# EAGLE board Sensori+Base (EAGLE 7.7.0)
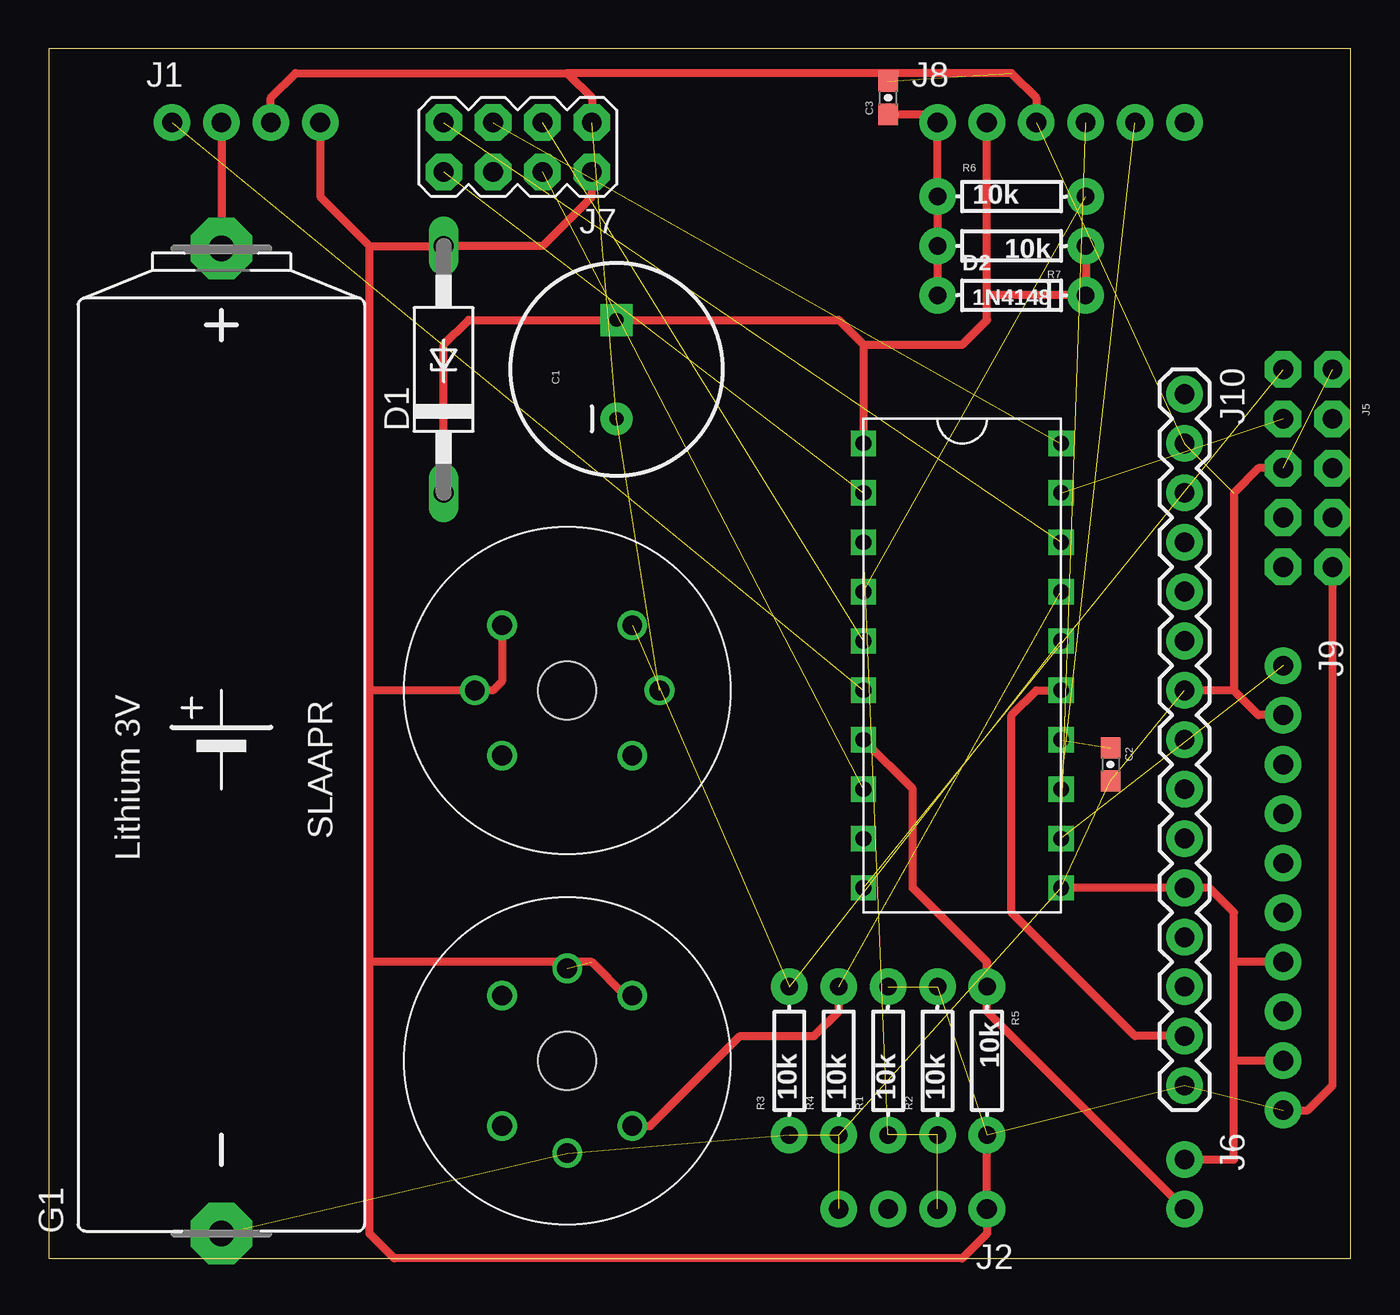
[diagram p0: board, top side]

Size 66.98 x 62.22 mm. Coordinates in mm from the lower left corner, seen from the top.
Outline: 0,0 66.98,0 66.98,62.22 0,62.22 0,0
Copper layers (1*16): Top 0.035mm / dielectric 1.5mm / Bottom 0.035mm
Design rules "default": minimum track width 10mil, minimum drill 24mil, track to track 8mil, track to pad 8mil, pad to pad 8mil, via to via 8mil, smd to smd 8mil, copper to edge 40mil, drill to drill 8mil, minimum pad ring 10mil, minimum via ring 8mil, stop-mask expansion 4mil, vias tented up to drill 0mil, thermal gap 10mil

## Footprints (pad centres in the part's own frame; a part is rotated, then mirrored left to right if it is on the bottom)
CPOL-RADIAL-1000UF-25V = drill 0.7 pad 1.651 square: 1 2.54,0 | drill 0.7 pad 1.651: 2 -2.54,0
0603-CAP = smd 1.1 x 1: 1 -0.85,0; 2 0.85,0
F126Z12 = drill 1.016 long: A 6.35,0; C -6.35,0
DIODE-1N4148 = drill 0.9 pad 1.88: A -3.81,0; C 3.81,0
SL-160AA/PR = drill 1.321 pad 3.15 octagon: + 25.273,0; - -25.4,0
1X04_NO_SILK_ALL_ROUND = drill 1.016 pad 1.88: 1 0,0; 2 2.54,0; 3 5.08,0; 4 7.62,0
2X5_NOSILK = drill 1.016 pad 1.88 octagon: 1 -1.27,5.08; 2 1.27,5.08; 3 -1.27,2.54; 4 1.27,2.54; 5 -1.27,0; 6 1.27,0; 7 -1.27,-2.54; 8 1.27,-2.54; 9 -1.27,-5.08; 10 1.27,-5.08
1X02_NO_SILK = drill 1.016 pad 1.88: 1 0,0; 2 2.54,0
2X4 = drill 1.016 pad 1.88 octagon: 1 -3.81,-1.27; 2 -3.81,1.27; 3 -1.27,-1.27; 4 -1.27,1.27; 5 1.27,-1.27; 6 1.27,1.27; 7 3.81,-1.27; 8 3.81,1.27
1X06_NO_SILK = drill 1.016 pad 1.88: 1 0,0; 2 2.54,0; 3 5.08,0; 4 7.62,0; 5 10.16,0; 6 12.7,0
1X10_NO_SILK = drill 1.016 pad 1.88: 1 0,0; 2 2.54,0; 3 5.08,0; 4 7.62,0; 5 10.16,0; 6 12.7,0; 7 15.24,0; 8 17.78,0; 9 20.32,0; 10 22.86,0
1X15 = drill 1.016 pad 1.88: 1 0,0; 2 2.54,0; 3 5.08,0; 4 7.62,0; 5 10.16,0; 6 12.7,0; 7 15.24,0; 8 17.78,0; 9 20.32,0; 10 22.86,0; 11 25.4,0; 12 27.94,0; 13 30.48,0; 14 33.02,0; 15 35.56,0
AXIAL-0.3EZ = drill 0.9 pad 1.88: P$1 -3.81,0; P$2 3.81,0
MQ-3 = drill 1.016: A1 -3.35,3.35; A2 -3.35,-3.35; B1 3.35,3.35; B2 3.35,-3.35; HA -4.75,0; HB 4.75,0 | hole 3: 0,0
SPDIP-20PIN = drill 0.8 square: P$1 -5.08,10.16; P$2 -5.08,7.62; P$3 -5.08,5.08; P$4 -5.08,2.54; P$5 -5.08,0; P$6 -5.08,-2.54; P$7 -5.08,-5.08; P$8 -5.08,-7.62; P$9 -5.08,-10.16; P$10 -5.08,-12.7; P$11 5.08,10.16; P$12 5.08,7.62; P$13 5.08,5.08; P$14 5.08,2.54; P$15 5.08,0; P$16 5.08,-2.54; P$17 5.08,-5.08; P$18 5.08,-7.62; P$19 5.08,-10.16; P$20 5.08,-12.7

## Placement (x,y rotation side)
C1  1mF or SuperCap  [CPOL-RADIAL-1000UF-25V]  29.21,45.72 90 top
C2  10uF  [0603-CAP]  54.61,25.4 270 top
C3  10uF  [0603-CAP]  43.18,59.69 90 top
D1  SCHOTTKY  [F126Z12]  20.32,45.72 90 top
D2  1N4148  [DIODE-1N4148]  49.53,49.53 0 top
G1  SL-160AA/PR  [SL-160AA/PR]  8.89,26.67 90 top
J1  POWER  [1X04_NO_SILK_ALL_ROUND]  6.35,58.42 0 top
J2  HUMIDITY & TEMPERATURE SENSOR  [1X04_NO_SILK_ALL_ROUND]  48.26,2.54 180 top
J5  RASPBERRY  [2X5_NOSILK]  64.77,40.64 180 top
J6  FLOOD DETECTOR  [1X02_NO_SILK]  58.42,5.08 270 top
J7  RTX  [2X4]  24.13,57.15 180 top
J8  PICKIT  [1X06_NO_SILK]  45.72,58.42 0 top
J9  TX 433MHz  [1X10_NO_SILK]  63.5,30.48 270 top
J10  RX 433MHz  [1X15]  58.42,44.45 270 top
R1  10k  [AXIAL-0.3EZ]  43.18,10.16 90 top
R2  10k  [AXIAL-0.3EZ]  45.72,10.16 90 top
R3  10k  [AXIAL-0.3EZ]  38.1,10.16 90 top
R4  10k  [AXIAL-0.3EZ]  40.64,10.16 90 top
R5  10k  [AXIAL-0.3EZ]  48.26,10.16 270 top
R6  10k  [AXIAL-0.3EZ]  49.53,54.61 0 top
R7  10k  [AXIAL-0.3EZ]  49.53,52.07 180 top
U2-CO2  GAS_SENSOR  [MQ-3]  26.67,29.21 0 top
U3-METHANE  GAS_SENSOR  [MQ-3]  26.67,10.16 270 top
U$1  PIC18F1XK50  [SPDIP-20PIN]  46.99,31.75 0 top

## Library data of the parts
C1 R1-R7 = SparkFun-Passives
C2 C3 = SparkFun-Capacitors; PROD_ID: CAP-11015
D1 = diode
D2 = SparkFun-DiscreteSemi; PROD_ID: DIO-08378
G1 = battery
J1 J2 = SparkFun-Connectors; PROD_ID: CONN-09696
J5-J7 J10 = SparkFun-Connectors
J8 = SparkFun-Connectors; PROD_ID: CONN-08437
J9 = SparkFun-Connectors; PROD_ID: CONN-11563
U2-CO2 U3-METHANE = SparkFun-Sensors
U$1 = Luca

## Nets
+3V3: D1.A J1.4 J2.1 J5.1 J7.2 J9.10 J10.15 R1.P$2 R2.P$2 R5.P$2 U2-CO2.A1 U2-CO2.HA U3-METHANE.A1 U3-METHANE.HA
GND: C1.2 C2.2 C3.2 G1.- J1.3 J2.4 J5.6 J5.9 J6.1 J7.1 J8.3 J9.2 J9.7 J9.9 J10.2 J10.7 J10.11 R3.P$1 R4.P$1 U2-CO2.HB U3-METHANE.HB U$1.P$20
N$1: J7.3 U$1.P$5
N$2: J7.4 U$1.P$8
N$3: J7.5 U$1.P$11
N$4: J7.6
N$5: J7.7 U$1.P$13
N$6: J7.8 U$1.P$2
N$7: J1.1 U$1.P$6
N$8: G1.+ J1.2
N$9: J2.2 R1.P$1 R2.P$1 U$1.P$3
N$10: R4.P$2 U3-METHANE.B1 U$1.P$14
N$11: R3.P$2 U2-CO2.B1 U$1.P$15
N$12: J5.10 U$1.P$10
N$13: J5.8 U$1.P$12
N$14: J6.2 R5.P$1 U$1.P$7
N$15: R6.P$2 U$1.P$4
N$16: J8.4 J9.1 U$1.P$19
N$17: J8.5 U$1.P$18
N$18: C2.1 U$1.P$17
N$19: C3.1 D2.A J8.1 R6.P$1 R7.P$2
N$20: J10.14 U$1.P$16
VDD: C1.1 D1.C D2.C J8.2 R7.P$1 U$1.P$1

## Tracks (layer width: path | path; a pad name or v marks a point on that pad's centre or on a via)
+3V3  (5 unrouted)
  Top 0.406: J1.4 13.97,54.61 16.51,52.07 | 16.51,52.07 D1.A 25.4,52.07 27.94,54.61 J7.2 | 16.51,15.24 16.51,1.27 17.78,0 46.99,0 48.26,1.27 J2.1 R5.P$2 | 16.51,15.24 16.51,29.21 | 16.51,29.21 16.51,52.07 | U3-METHANE.A1 29.67,13.51 27.94,15.24 16.51,15.24 | 16.51,29.21 U2-CO2.HA 22.86,29.21 23.32,29.67 U2-CO2.A1 | J9.10 64.77,7.62 66.04,8.89 J5.1
GND  (13 unrouted)
  Top 0.406: J1.3 11.43,59.69 12.7,60.96 26.67,60.96 | 26.67,60.96 27.94,59.69 J7.1 | U$1.P$20 J10.11 59.69,19.05 60.96,17.78 60.96,15.24 | J6.1 60.96,5.08 60.96,10.16 | 60.96,10.16 60.96,15.24 | J9.9 60.96,10.16 | J9.7 60.96,15.24 | J9.2 62.23,27.94 60.96,29.21 | 60.96,29.21 J10.7 | J5.6 62.23,40.64 60.96,39.37 60.96,29.21 | J8.3 50.8,59.69 49.53,60.96 26.67,60.96
N$1  (1 unrouted)
N$2  (1 unrouted)
N$3  (1 unrouted)
N$5  (1 unrouted)
N$6  (1 unrouted)
N$7  (1 unrouted)
N$8
  Top 0.406: J1.2 G1.+
N$9  (3 unrouted)
N$10  (1 unrouted)
  Top 0.406: U3-METHANE.B1 30.94,6.81 35.56,11.43 39.37,11.43 40.64,12.7 R4.P$2
N$11  (2 unrouted)
N$12  (1 unrouted)
N$13  (1 unrouted)
N$14
  Top 0.406: J6.2 48.26,12.7 R5.P$1 48.26,15.24 44.45,19.05 44.45,24.13 U$1.P$7
N$15  (1 unrouted)
N$16  (2 unrouted)
N$17  (1 unrouted)
N$18  (1 unrouted)
N$19
  Top 0.406: D2.A R7.P$2 R6.P$1 J8.1 45.3,58.84 C3.1
N$20
  Top 0.406: J10.14 55.88,11.43 49.53,17.78 49.53,27.94 50.8,29.21 U$1.P$16
VDD
  Top 0.406: D1.C 20.32,46.99 21.59,48.26 C1.1 40.64,48.26 41.91,46.99 | 41.91,46.99 U$1.P$1 | 41.91,46.99 46.99,46.99 48.26,48.26 48.26,49.53 | 48.26,49.53 J8.2 | 48.26,49.53 D2.C R7.P$1